# Altium PCB PCB1.PcbDoc
Units mil, origin at the board's own origin, x right, y up, seen from the top; angles counter-clockwise.
Board outline 2000 x 2000 mil, 2 copper layers (Top Layer, Bottom Layer); 3 components, 24 nets, 48 pads, 0 vias.
Unrouted connection lines stored in the file: 24.
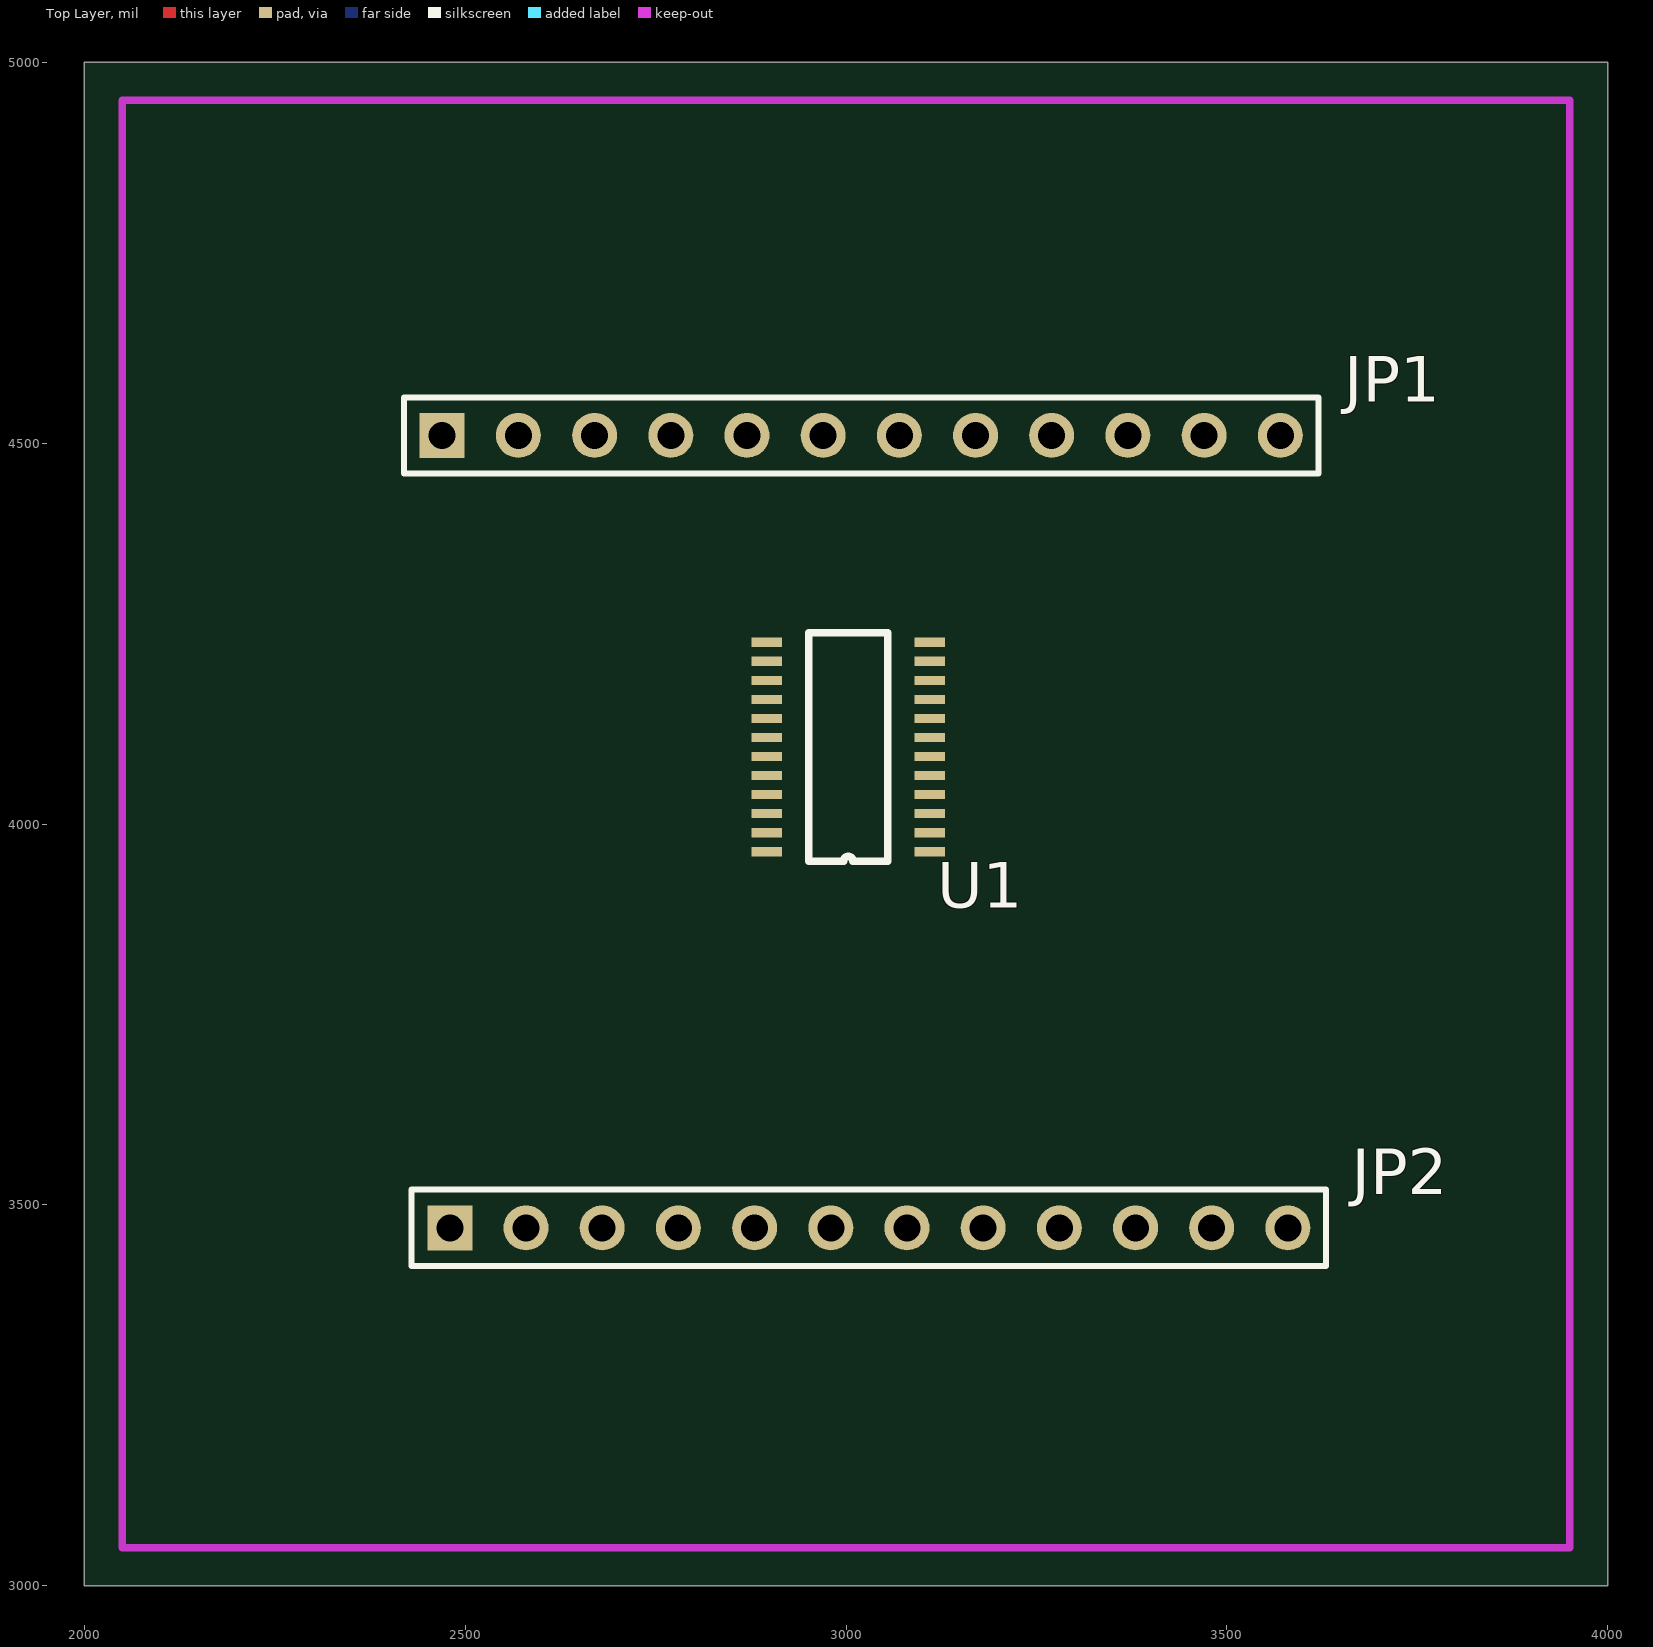
[diagram p0: Top Layer view]
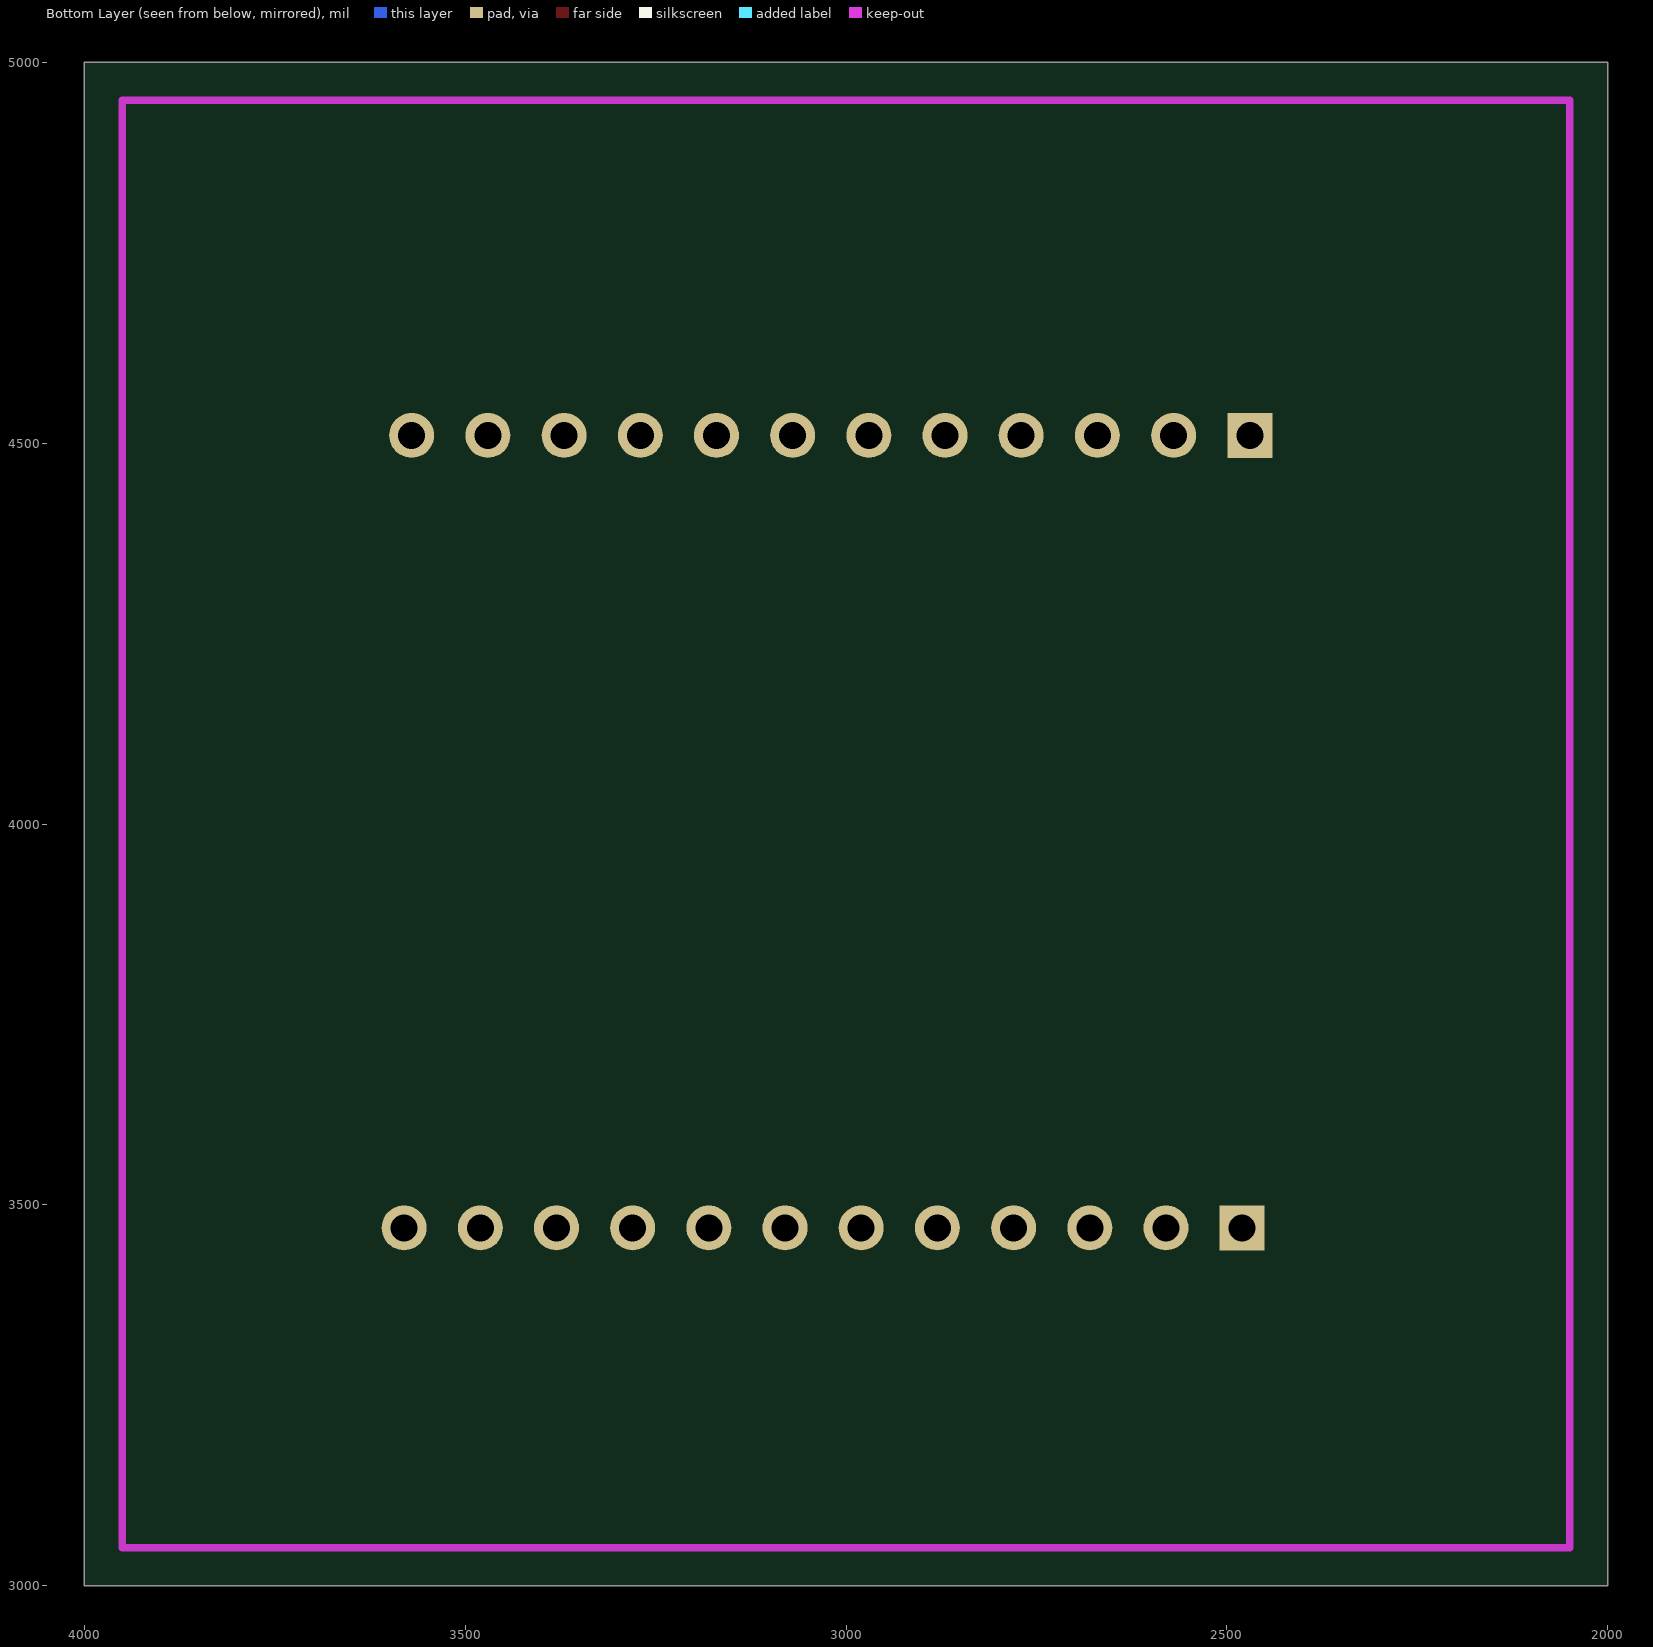
[diagram p1: Bottom Layer view, seen from below]

## Layer stack, top to bottom
Top Layer: signal copper 1.4
Dielectric: core 12.6, FR-4, Dk 4.8
Bottom Layer: signal copper 1.4

## Board outline
2000,3000 4000,3000 4000,5000 2000,5000

## Design rules (kind name [scope] priority, off if disabled: settings)
Clearance [All] p1: gap=8
ComponentClearance [All] p1: gap=10 collisioncheckmode=0 verticalgap=10
PolygonConnect [All] p1: connectstyle=Relief reliefconductorwidth=10 reliefentries=4 polygonreliefangle="90 Angle"
RoomDefinition Sheet1 [InComponentClass('Sheet1')] p1: confinementstyle=ConfineIn formatcopy=TRUE lockcomponents=FALSE outline 4000,3120 4740,3120 4740,4440 4000,4440
RoutingVias [All] p1: holewidth=25 width=40 viastyle="Through Hole" minholewidth=28 minwidth=50 maxholewidth=28 maxwidth=50
SolderMaskExpansion [All] p1: expansion=4
TestPointUsage [All] p1: valid=0 allowmultiple=FALSE
Testpoint [All] p1: side=15 testpointundercomponent=TRUE minsize=40 maxsize=100 preferedsize=60 minholesize=0 maxholesize=40 preferedholesize=32 testpointgrid=1 style=1023 order=0-123456789
Width [All] p1: maxlimit=8 minlimit=8 preferedwidth=8
18 further rules are at their usual default settings.

## Components (designator, comment, footprint, x,y, rotation, side; value= is the part's Value field where it differs from the comment)
JP1 "Header 12" HDR1X12 2470,4510 r0 top
JP2 "Header 12" HDR1X12 2480,3470 r0 top
U1 "MAX7313" QSOP24 3110,3963.56 r180 top

## Footprints (in the part's own frame and the unit in brackets; to place one, negate y for a bottom-side part, rotate by r counter-clockwise, add the part's x,y. Pads: shape width x height; smd on the part's side, far side on the other; paste and mask are expansions set on the pad)
HDR1X12 [mm]
  rect 1.5x1.5 hole 0.9: 1(0,0)
  round 1.5 hole 0.9: 2(2.54,0) 3(5.08,0) 4(7.62,0) 5(10.16,0) 6(12.7,0) 7(15.24,0) 8(17.78,0) 9(20.32,0) 10(22.86,0) 11(25.4,0) 12(27.94,0)
  silkscreen extent -1.27,-1.27 29.21,1.27
QSOP24 [mil]
  rect 40x12 smd: 1(0,0) 2(0,-25) 3(0,-50) 4(0,-75) 5(0,-100) 6(0,-125) 7(0,-150) 8(0,-175) 9(0,-200) 10(0,-225) 11(0,-250) 12(0,-275) 13(214,-275) 14(214,-250) 15(214,-225) 16(214,-200) 17(214,-175) 18(214,-150) 19(214,-125) 20(214,-100) 21(214,-75) 22(214,-50) 23(214,-25) 24(214,0)
  silkscreen extent 55,-288 159,13

## Part data
JP1 JP2: "Header, 12-Pin"

## Nets (pads, with @x,y where several pads share a name; then routed paths per layer and width w, separated by ;. In a path a pad name is that pad's centre, name@x,y a point inside that pad or via, vN(x,y) a via of type N, cw(c..) or ccw(c..) an arc to the next point about the centre after c; other vN are vias at no path point)
NetJP1_1: JP1.1 U1.1
NetJP1_2: JP1.2 U1.2
NetJP1_3: JP1.3 U1.3
NetJP1_4: JP1.4 U1.4
NetJP1_5: JP1.5 U1.5
NetJP1_6: JP1.6 U1.6
NetJP1_7: JP1.7 U1.7
NetJP1_8: JP1.8 U1.8
NetJP1_9: JP1.9 U1.9
NetJP1_10: JP1.10 U1.10
NetJP1_11: JP1.11 U1.11
NetJP1_12: JP1.12 U1.12
NetJP2_1: JP2.1 U1.24
NetJP2_2: JP2.2 U1.23
NetJP2_3: JP2.3 U1.22
NetJP2_4: JP2.4 U1.21
NetJP2_5: JP2.5 U1.20
NetJP2_6: JP2.6 U1.19
NetJP2_7: JP2.7 U1.18
NetJP2_8: JP2.8 U1.17
NetJP2_9: JP2.9 U1.16
NetJP2_10: JP2.10 U1.15
NetJP2_11: JP2.11 U1.14
NetJP2_12: JP2.12 U1.13

## Keep-outs
Keep-Out Layer:
  lines w10: 2050,3050 3950,3050 3950,4950 2050,4950 2050,3050